# Altium PCB OK335xD V2.4 20160121.PcbDoc (part 2 of 4)
Units mm, origin at the board's own origin, x right, y up, seen from the top; angles counter-clockwise.
Board outline 190 x 130 mm, 4 copper layers (Top Layer, GND, POWER, Bottom Layer); 326 components, 332 nets, 1399 pads, 799 vias.
Unrouted connection lines stored in the file: 413.
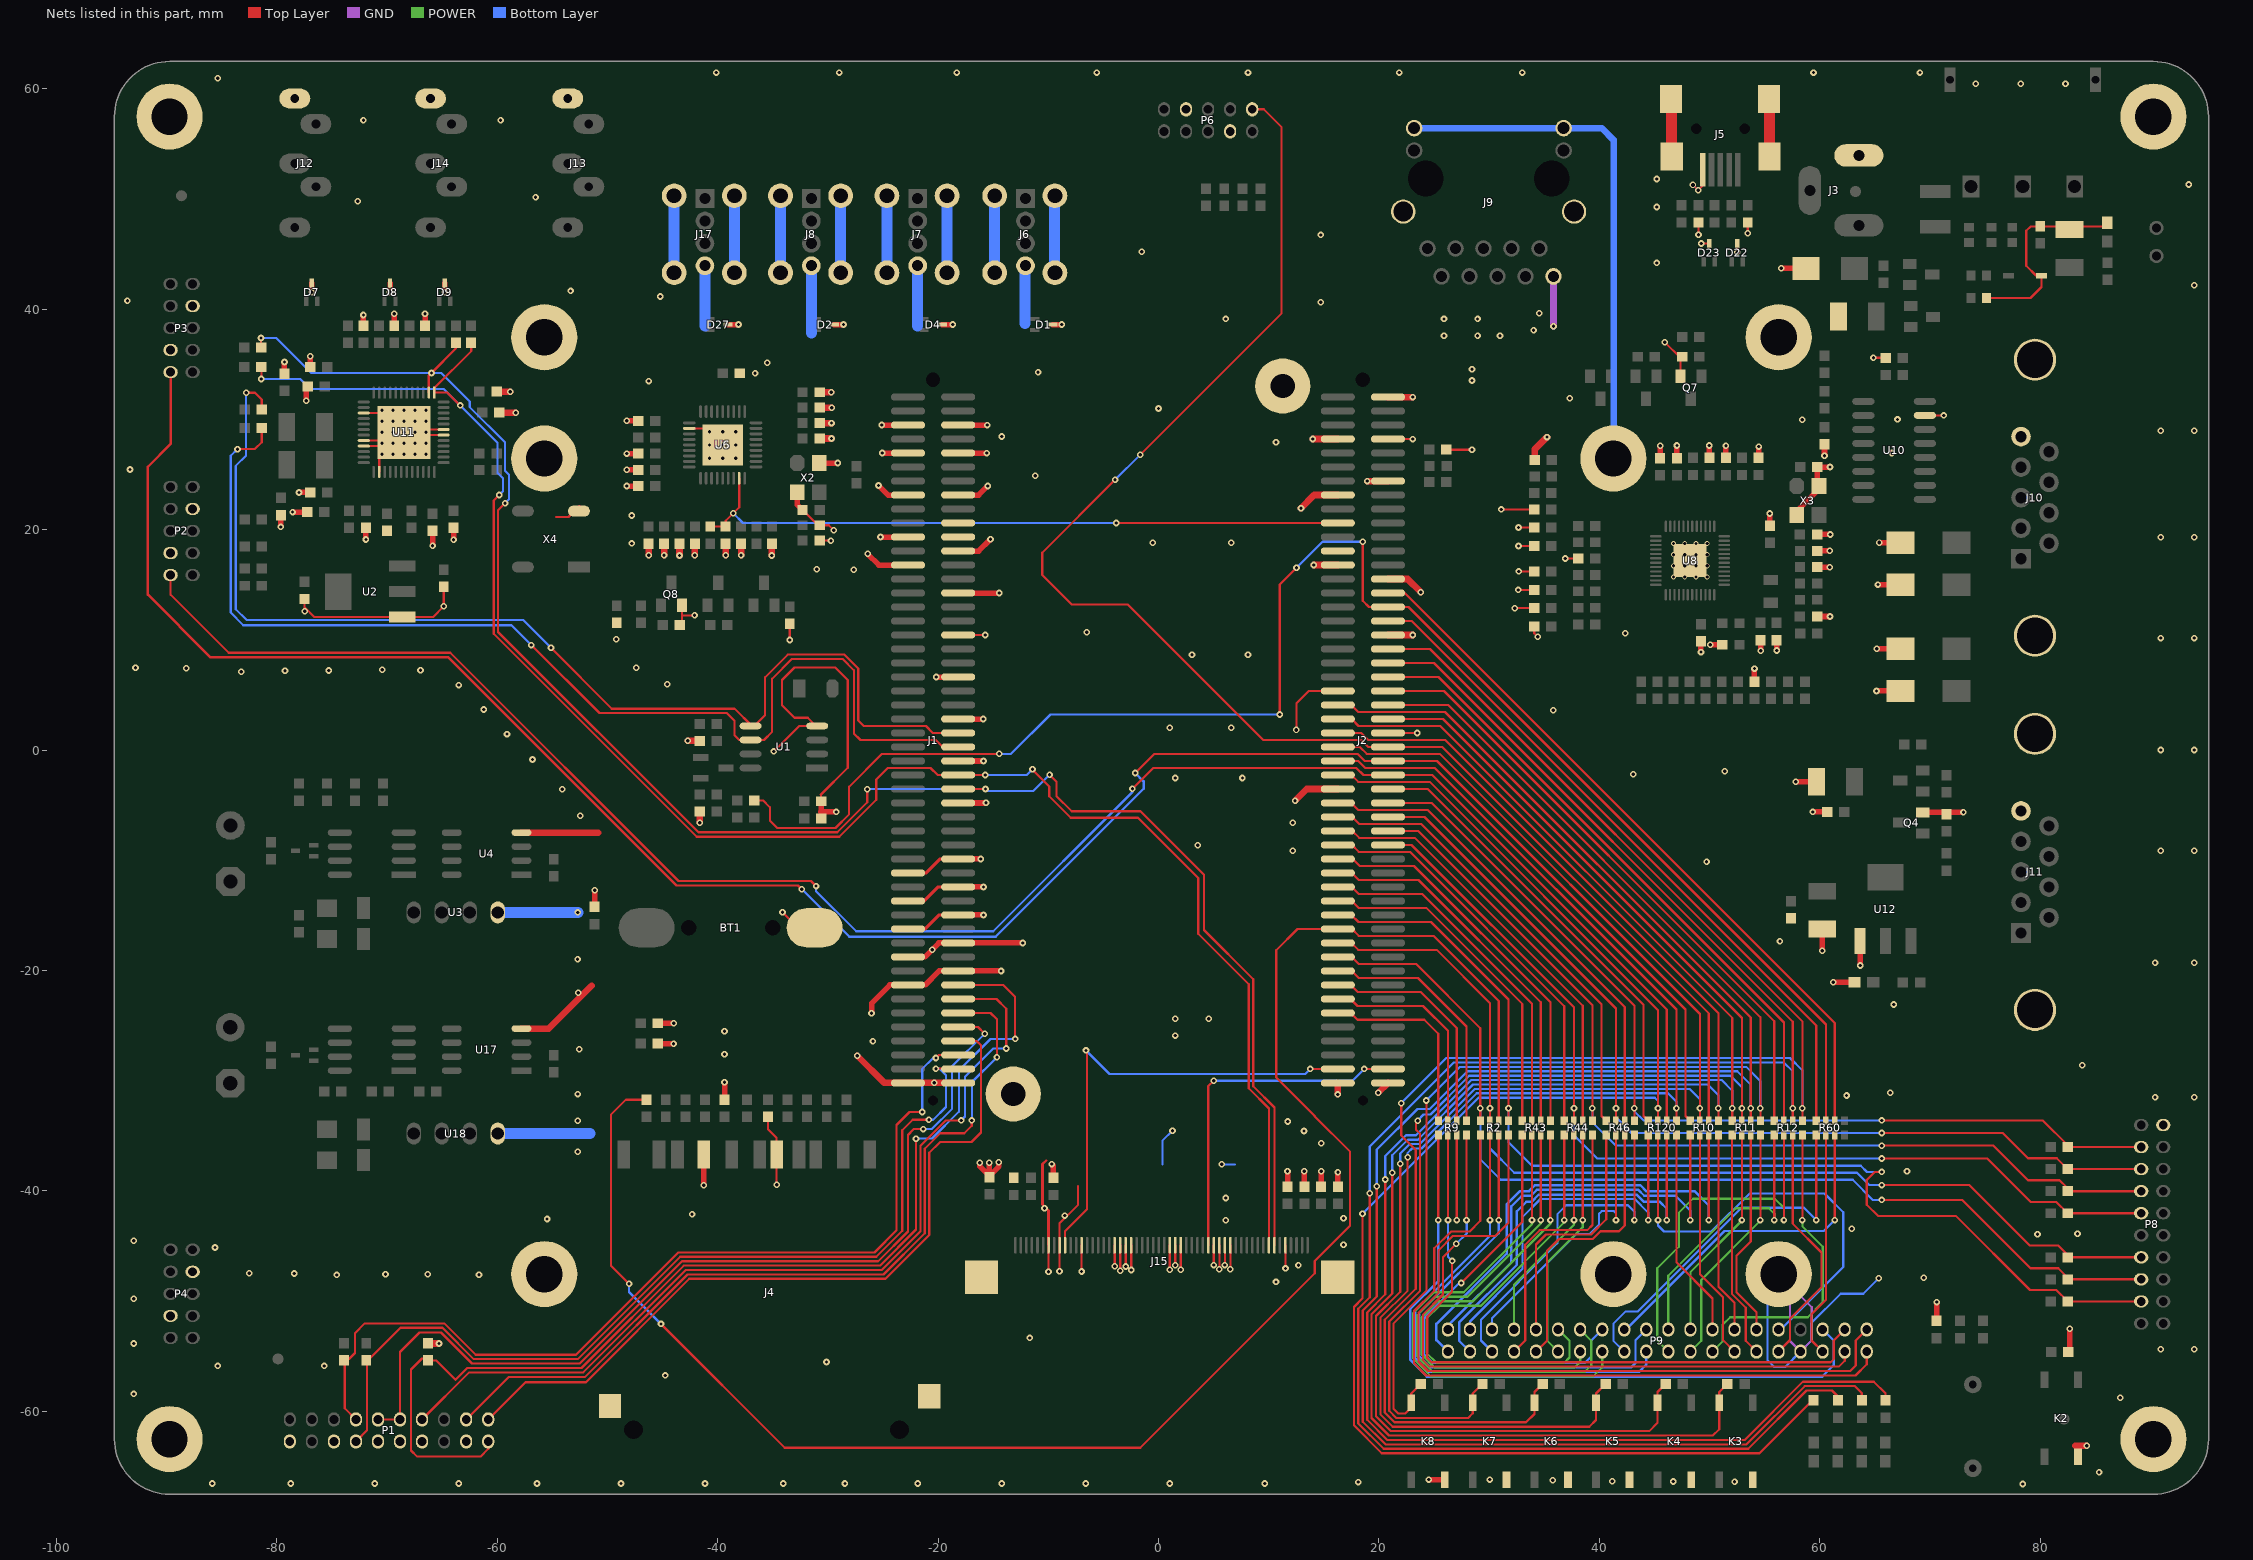
[diagram p4: the nets of this part, all layers, seen from the top]

## Via types
v1: diameter 0.6, hole 0.3, Top Layer to Bottom Layer, tented both sides, 718 vias
v2: diameter 0.66, hole 0.3, Top Layer to Bottom Layer, tented both sides, 34 vias
v3: diameter 0.6, hole 0.35, Top Layer to Bottom Layer, tented both sides, 25 vias
v4: diameter 0.45, hole 0.3, Top Layer to Bottom Layer, tented both sides, 16 vias
v5: diameter 0.4, hole 0.254, Top Layer to Bottom Layer, 4 vias
v6: diameter 0.6, hole 0.3, Top Layer to Bottom Layer, 2 vias

## Nets (pads, with @x,y where several pads share a name; then routed paths per layer and width w, separated by ;. In a path a pad name is that pad's centre, name@x,y a point inside that pad or via, vN(x,y) a via of type N, cw(c..) or ccw(c..) an arc to the next point about the centre after c; other vN are vias at no path point) (continued)
GND: BT1.2 C1.1 C2.1 C3.2 C4.1 C5.2 C6.2 C7.2 C9.2 C10.2 C11.2 C12.2 C14.2 C15.2 C16.2 C17.2 C18.1 C19.1 C20.1 C21.2 C22.2 C23.1 C24.2 C25.2 C26.2 C27.2 C28.2 C29.2 C30.2 C31.2 C32.2 C33.2 C34.1 C35.1 C36.1 C37.1 C38.1 C39.1 C40.1 C41.1 C42.1 C43.1 C44.1 C45.1 C46.1 C47.1 C50.2 C51.2 C56.2 C58.2 C60.2 C61.2 C62.2 C63.2 C64.2 C65.2 C66.2 C67.1 C68.2 C69.2 C70.2 C71.1 C72.2 C73.2 C74.2 C76.1 C77.1 C78.2 C79.1 C80.1 C83.2 C84.2 C85.2 D1.3 D2.3 D4.3 D5.1 D6.1 D7.3 D8.3 D9.3 D10.1 D11.1 D12.1 D13.1 D22.3 D23.3 D27.3 J1.5 J1.6 J1.9 J1.10 J1.15 J1.16 J1.21 J1.24 J1.25 J1.30 J1.36 J1.42 J1.48 J1.54 J1.60 J1.68 J1.69 J1.72 J1.73 J1.76 J1.77 J1.80 J1.81 J1.84 J1.85 J1.99 J1.100 J2.2 J2.7 J2.8 J2.14 J2.15 J2.25 J2.28 J2.36 J2.43 J2.50 J2.57 J2.99 J2.100 J3.2 J4.3@-34.644,-36.703 J4.6 J4.12 J4.13 J5.5 J5.6 J5.7 J5.8 J5.9 J6.0 J6.4 J7.0 J7.4 J8.0 J8.4 J9.1 J9.D2 J9.D4 J9.SHLD1 J9.SHLD2 J10.5 J10.10 J10.11 J11.5 J11.10 J11.11 J12.5 J13.5 J14.5 J15.5 J15.15 J15.16 J15.17 J15.18 J15.24 J15.25 J15.26 J15.33 J15.34 J15.35 J15.36 J15.42 J15.46 J15.48 J15.55 J15.56 J17.0 J17.4 K2.3 K3.3 K4.3 K5.3 K6.3 K7.3 K8.3 LED1.2 LED2.2 P1.4 P1.8 P1.10 P1.12 P1.16 P1.20 P2.4 P2.7 P3.4 P3.7 P4.4 P4.7 P6.4 P6.7 P8.2 P9.8 pad. pad.5 pad.6 pad.11 Q4.2 Q7.2 Q8.2 R29.2 R36.1 R42.1 R45.1 R53.1 R54.2 R55.2 R56.2 R57.2 R58.2 R85.2 R88.1 R89.1 R90.1 R91.1 R92.1 R93.1 R94.1 R95.1 R101.1 R102.1 R106.2 R111.2 R114.2 R117.2 R141.1 U1.4 U2.3 U3.1 U4.4 U6.11 U6.37 U8.49 U10.15 U11.0 U11.15 U11.20 U11.21 U11.26 U11.42 U11.43 U12.3 U17.4 U18.1 X2.2 X2.4 X3.2 X3.4 X4.2 | length 654.2
  Top Layer w0.2: v1(-77.47,12.598) -77.47,12.954 ; C11.2@-77.47,13.703 -77.47,12.954 ; U11.21@-72.103,27.579 U11.0@-70.453,27.579 ; U11.20@-72.103,28.079 U11.0@-69.453,28.079 ; U11.15@-72.103,30.579 -70.203,30.579 v2(-69.453,29.829) v2(-68.453,28.829) ; U11.26@-70.703,25.229 -70.703,26.579 v2(-70.453,26.829) v2(-69.453,27.829) v2(-68.453,28.829) ; U11.0@-66.453,29.079 U11.43@-64.853,29.079 ; U11.42@-64.853,28.579 -68.203,28.579 v2(-68.453,28.829) ; C73.2@-64.851,14.69 v1(-64.851,13.035) -65.808,12.078 U2.3@-68.628,12.078 -76.594,12.078 -77.47,12.954 ; -54.651,21.143 -53.533,21.143 X4.2@-52.553,22.123 ; R114.2@-43.243,11.531 -43.243,12.217 ; Q8.2@-43.243,13.132 -43.243,12.217 ; U6.11@-42.567,29.184 -41.042,29.184 v2(-40.742,28.884) v2(-39.542,27.684) ; v1(-42.088,12.217) -43.243,12.217 ; C12.2@-35.433,-33.274 -35.433,-34.417 -34.644,-35.206 J4.3@-34.644,-36.703 v1(-34.644,-39.445) ; v1(-34.9,-0.127) -32.588,2.184 -31.085,2.184 -31.822,2.921 -33.02,2.921 -34.163,4.064 -34.163,6.35 -33.02,7.493 -29.337,7.493 -28.194,6.35 -28.194,-1.613 -30.619,-4.039 ; v1(-34.112,-14.707) -32.69,-16.129 BT1.2@-31.191,-16.129 ; v1(-33.452,9.982) C16.2@-33.452,11.468 ; C20.1@-32.296,21.793 -30.899,20.396 C33.2@-30.746,20.396 -29.921,20.396 v1(-29.464,19.939) ; R53.1@-30.746,18.999 v1(-29.718,18.999) ; -30.632,-4.026 -30.619,-4.039 ; -30.619,-5.613 -30.619,-4.039 ; J1.36@-18.175,10.435 v1(-15.727,10.435) ; -10.516,-37.567 -10.185,-37.236 ; v1(-9.975,-47.327) J15.48@-9.975,-44.925 ; v1(-8.975,-47.304) J15.46@-8.975,-44.925 -8.975,-42.935 -7.29,-41.25 -7.29,-39.548 ; v1(-6.975,-47.31) J15.42@-6.975,-44.925 ; v1(-3.975,-46.85) J15.36@-3.975,-44.925 ; v1(-3.475,-47.249) J15.35@-3.475,-44.925 ; v1(-2.975,-46.86) J15.34@-2.975,-44.925 ; v1(-2.475,-47.182) J15.33@-2.475,-44.925 ; v1(1.025,-47.159) J15.26@1.025,-44.925 ; v1(1.525,-46.735) J15.25@1.525,-44.925 ; v1(2.025,-47.161) J15.24@2.025,-44.925 ; v1(5.025,-46.732) J15.18@5.025,-44.925 ; v1(5.525,-47.105) J15.17@5.525,-44.925 ; v1(6.025,-46.731) J15.16@6.025,-44.925 ; v1(6.525,-47.114) J15.15@6.525,-44.925 ; v1(11.525,-47.034) J15.5@11.525,-44.925 ; v3@12.522,1.803 12.522,4.242 13.639,5.358 J2.43@16.275,5.358 ; J2.50@20.821,1.549 J2.50@20.825,1.545 v1(23.474,1.545) ; J2.8@20.825,28.215 v1(23.068,28.215) ; R36.1@26.124,27.254 v1(28.448,27.254) ; v1(31.102,21.832) R95.1@34.103,21.832 ; v1(32.331,12.874) R88.1@34.103,12.874 ; v1(32.639,14.529) R90.1@34.099,14.529 ; v1(32.664,18.517) R89.1@34.099,18.517 ; v1(32.664,20.193) R93.1@34.099,20.193 ; v1(32.69,16.205) R92.1@34.099,16.205 ; R91.1@34.099,11.201 34.099,10.605 v1(34.417,10.287) ; v1(36.897,17.383) C46.1@38.102,17.383 ; v1(45.949,37.008) 47.358,35.598 Q7.2@47.358,33.909 ; v3(48.489,51.283) v1(48.971,50.8) 49.375,51.204 J5.5@49.375,52.655 ; v1(48.997,46.761) R45.1@48.997,47.866 ; v1(49.238,45.961) D23.3@49.962,45.961 ; v1(52.527,45.161) D22.3@52.527,45.961 ; v1(53.467,46.888) C15.2@53.467,47.866 ; v1(64.872,35.585) C50.2@65.976,35.585 ; U10.15@69.544,30.36 v1(71.254,30.36) ; R58.2@75.122,41.021 79.121,41.021 80.113,42.013 D6.1@80.113,43.053 79.629,43.053 78.74,43.942 78.74,47.117 79.134,47.511 C22.2@80.01,47.511 85.777,47.511 LED1.2@86.106,47.84
  Top Layer w0.26: -10.516,-37.567 -10.516,-41.224 -9.975,-41.765 J15.48@-9.975,-44.925
  Top Layer w0.3: J1.77@-22.725,-16.232 -21.159,-16.232 -19.893,-14.965 J1.76@-18.175,-14.965 ; J1.73@-22.725,-13.692 -21.235,-13.692 -19.969,-12.425 J1.72@-18.175,-12.425 ; J1.69@-22.725,-11.152 -21.058,-11.152 -19.791,-9.885 J1.68@-18.175,-9.885
  Top Layer w0.5: v1(-79.629,20.244) R101.1@-79.629,21.323 ; R102.1@-79.299,34.151 v1(-79.299,35.204) ; v1(-78.562,21.59) C63.2@-77.354,21.59 ; v1(-77.978,23.368) C64.2@-76.975,23.368 ; v1(-77.329,31.688) C61.2@-77.329,32.995 ; C62.2@-76.95,34.773 v1(-76.95,35.725) ; v1(-76.835,41.529) D7.3@-76.835,42.354 ; C56.2@-72.136,38.494 v1(-72.136,39.472) ; v1(-71.907,19.101) C66.2@-71.907,20.155 ; v1(-69.723,41.529) D8.3@-69.723,42.354 ; C60.2@-69.342,38.494 v1(-69.342,39.599) ; C58.2@-66.548,38.494 v1(-66.548,39.573) ; v1(-65.862,18.542) C69.2@-65.862,19.776 ; v1(-64.77,41.529) D9.3@-64.77,42.354 ; v1(-63.957,19.075) C70.2@-63.957,20.155 ; C2.1@-51.156,-14.236 v1(-51.156,-12.725) ; v1(-48.235,23.952) C26.2@-47.206,23.952 ; v1(-48.235,25.425) C24.2@-47.206,25.425 ; v1(-48.235,26.899) C29.2@-47.206,26.899 ; v1(-48.235,29.87) C30.2@-47.206,29.87 ; C67.1@-45.428,-26.645 v1(-43.993,-26.645) ; C1.1@-45.428,-24.79 v1(-43.967,-24.79) ; v1(-41.248,-39.495) J4.6@-41.248,-36.703 ; C14.2@-39.37,-31.724 v1(-39.37,-30.15) ; D27.3@-39.053,38.608 v1(-38.1,38.608) ; X2.2@-32.775,23.389 -32.775,22.272 C20.1@-32.296,21.793 ; X2.4@-30.775,26.039 v1(-29.104,26.039) ; -30.619,-5.613 -30.594,-5.613 ; C76.1@-30.594,-6.223 -30.594,-5.613 ; C77.1@-30.594,-4.648 -30.594,-5.613 ; D2.3@-29.401,38.608 v1(-28.575,38.608) ; v1(-29.235,-5.613) -30.594,-5.613 ; v1(-26.391,17.805) -25.374,16.788 J1.25@-22.725,16.788 ; v1(-26.035,-23.876) -26.035,-22.987 -24.36,-21.312 -22.725,-21.312 -21.159,-21.312 -19.893,-20.045 J1.84@-18.175,-20.045 v1(-14.279,-20.045) ; v1(-25.4,24.003) -24.535,23.138 J1.15@-22.725,23.138 ; v1(-25.223,19.328) J1.21@-22.725,19.328 ; v1(-25.12,29.488) J1.5@-22.725,29.488 ; v1(-25.069,26.948) J1.9@-22.725,26.948 ; J1.81@-22.725,-18.772 -21.185,-18.772 -19.918,-17.505 J1.80@-18.175,-17.505 v1(-12.315,-17.505) ; v1(-20.172,6.625) J1.42@-18.175,6.625 ; D4.3@-19.622,38.608 v1(-18.669,38.608) ; J1.76@-18.175,-14.965 v1(-15.879,-14.965) ; J1.72@-18.175,-12.425 v1(-15.879,-12.425) ; J1.68@-18.175,-9.885 v1(-16.133,-9.885) ; J1.60@-18.175,-4.805 -15.676,-4.805 v1(-15.646,-4.775) ; J1.54@-18.175,-0.995 v1(-15.879,-0.995) ; J1.48@-18.175,2.815 v1(-15.905,2.815) ; J1.30@-18.175,14.245 v1(-14.457,14.245) ; J1.24@-18.175,18.055 -16.311,18.055 v1(-15.24,19.126) ; J1.16@-18.175,23.135 -16.311,23.135 v1(-15.494,23.952) ; J1.10@-18.175,26.945 v1(-15.575,26.945) ; J1.6@-18.175,29.485 v1(-15.524,29.485) ; v1(-16.205,-37.44) -16.205,-37.784 C74.2@-15.342,-38.648 ; v1(-15.342,-37.44) C74.2@-15.342,-38.648 ; v1(-14.478,-37.414) -14.478,-37.784 C74.2@-15.342,-38.648 ; v1(-9.677,-37.567) -9.525,-37.719 C4.1@-9.525,-38.824 ; D1.3@-9.589,38.608 v1(-8.763,38.608) ; C85.2@11.709,-39.611 v1(11.709,-38.227) ; C84.2@13.233,-39.611 v1(13.233,-38.227) ; C83.2@14.757,-39.611 v1(14.757,-38.227) ; C78.2@16.281,-39.611 v1(16.281,-38.303) ; v1(24.511,-66.192) K8.3@25.984,-66.192 ; C41.1@45.516,26.493 v1(45.516,27.609) ; C45.1@47.041,26.493 v1(47.041,27.635) ; v1(49.225,8.89) C39.1@49.225,9.868 ; C40.1@49.986,26.499 v1(49.986,27.634) ; v1(50.063,9.55) C36.1@51.043,9.55 ; C47.1@51.486,26.499 v1(51.486,27.61) ; C79.1@54.077,6.211 v1(54.077,7.391) ; R85.2@54.458,26.505 v1(54.458,27.534) ; v1(54.641,8.997) C35.1@54.641,9.981 ; C42.1@55.474,20.358 v1(55.474,21.463) ; v1(56.091,9.035) C34.1@56.091,9.981 ; v1(56.515,43.713) D5.1@59.141,43.713 ; v1(57.836,-2.87) C6.2@59.712,-2.87 ; X3.2@57.916,21.306 57.916,21.696 59.779,23.559 C37.1@59.779,25.679 v1(60.935,25.679) ; v1(59.36,-5.613) C7.2@60.668,-5.613 ; C71.1@59.754,12.116 v1(60.935,12.116) ; C38.1@59.754,19.558 v1(60.96,19.558) ; C43.1@59.76,16.597 v1(60.92,16.597) ; C44.1@59.76,18.078 v1(60.916,18.078) ; v1(60.223,-18.212) C9.2@60.223,-16.234 ; v1(60.431,26.691) C51.2@60.431,27.751 ; v1(61.214,-21.082) LED2.2@63.158,-21.082 ; v1(63.665,-19.546) U12.3@63.665,-17.326 ; v1(65.151,5.359) D12.1@67.31,5.359 ; v1(65.176,9.195) D13.1@67.31,9.195 ; v1(65.278,15.011) D10.1@67.31,15.011 ; v3(65.405,18.821) D11.1@67.31,18.821 ; Q4.2@69.342,-5.651 v1(73.038,-5.651) ; R117.2@70.612,-51.803 v1(70.612,-50.089) ; C80.1@82.688,-54.61 v1(82.688,-52.513)
  Top Layer w0.6: R29.2@-66.434,-53.848 v1(-65.278,-53.848) ; C68.2@-60.058,32.512 v1(-58.826,32.512) ; C5.2@-59.679,30.607 v1(-58.318,30.607) ; U17.4@-57.798,-25.273 -55.321,-25.273 -51.435,-21.387 ; U4.4@-57.798,-7.493 -50.851,-7.493 ; v1(-46.253,17.678) R54.2@-46.253,18.732 ; v1(-44.856,17.678) C25.2@-44.856,18.732 ; v1(-43.459,17.653) R55.2@-43.459,18.732 ; v1(-42.697,0.838) C3.2@-41.618,0.838 ; v1(-42.062,17.678) R56.2@-42.062,18.732 ; v1(-41.618,-6.602) C72.2@-41.618,-5.563 ; v1(-39.268,17.678) C18.1@-39.268,18.732 ; v1(-37.871,17.678) C17.2@-37.871,18.732 ; v1(-35.077,17.653) R42.1@-35.077,18.732 ; C19.1@-30.746,28.27 v1(-29.667,28.27) ; C27.2@-30.746,29.667 v1(-29.667,29.667) ; R57.2@-30.746,31.064 v1(-29.642,31.064) ; C32.2@-30.746,32.461 v1(-29.693,32.461) ; v1(-27.33,-27.737) -24.866,-30.202 -22.725,-30.202 v1(-20.345,-30.202) J1.100@-18.178,-30.202 ; v1(12.395,-4.597) 13.461,-3.532 J2.57@16.275,-3.532 ; v1(12.929,21.946) 14.121,23.138 J2.15@16.275,23.138 ; v1(13.996,28.218) J2.7@16.275,28.218 ; v1(14.096,16.788) J2.25@16.275,16.788 ; v1(16.275,-31.248) J2.99@16.275,-30.202 ; v1(18.944,24.405) J2.14@20.825,24.405 ; v3(19.94,-31.09) J2.100@20.825,-30.205 ; J2.36@20.825,10.435 v1@23.063,10.435 ; J2.28@20.825,15.515 22.61,15.515 v1(23.8,14.326) ; J2.2@20.825,32.025 v1(23.068,32.025) ; R94.1@34.125,26.314 34.125,27.267 v1(35.255,28.397) ; 83.185,-63.119 v1(84.226,-63.119)
  Top Layer w1: J5.7@46.555,53.875 46.555,57.731 ; J5.6@55.445,53.875 J5.8@55.445,59.03
  GND w0.2: pad.@56.275,-47.55 pad.@57.302,-48.577 ; pad.@57.302,-48.577 57.302,-53.618 P9.8@58.262,-54.578 59.284,-53.557 59.284,-50.559 pad.@57.302,-48.577
  GND w0.5: v1@13.183,-38.227 v1(13.233,-38.227)
  GND w0.6: v1(35.84,38.456) J9.1@35.84,42.977
  POWER w0.2: v1@5.715,-37.617 v1(5.74,-37.592)
  Bottom Layer w0.2: 0.354,-37.592 0.354,-35.46 v1(1.27,-34.544) ; v1(5.74,-37.592) 6.958,-37.592 ; pad.@56.275,-47.55 55.27,-48.555 55.27,-55.372 55.88,-55.982 56.859,-55.982 P9.8@58.262,-54.578 59.233,-53.607 59.233,-51.994 61.9,-49.327 63.957,-49.327 v1(65.354,-47.93)
  Bottom Layer w0.5: v1(-14.457,14.245) v1@-14.453,14.249
  Bottom Layer w0.6: J9.D4@23.2,56.427 J9.D2@36.76,56.427 40.22,56.427 41.3,55.347 pad.11@41.3,26.848
  Bottom Layer w1: U18.1@-59.944,-34.798 -51.562,-34.798 ; U3.1@-59.944,-14.732 v1(-52.68,-14.732) ; J17.0@-43.942,43.307 J17.0@-43.942,50.292 ; -41.148,38.481 J17.4@-41.148,43.942 ; J17.0@-38.481,43.307 J17.0@-38.481,50.292 ; J8.0@-34.29,43.307 J8.0@-34.29,50.292 ; -31.496,37.846 J8.4@-31.496,43.942 ; J8.0@-28.829,43.307 J8.0@-28.829,50.292 ; J7.0@-24.638,43.561 J7.0@-24.638,50.546 ; -21.844,38.481 J7.4@-21.844,44.196 ; J7.0@-19.177,43.561 J7.0@-19.177,50.546 ; J6.0@-14.89,43.59 J6.0@-14.89,50.575 ; -12.096,38.704 J6.4@-12.096,44.225 ; J6.0@-9.429,43.59 J6.0@-9.429,50.575
  other v1: 78.41,-66.599 -85.852,-66.548 -78.74,-66.548 -71.12,-66.548 -63.5,-66.548 -56.388,-66.548 -48.768,-66.548 -41.148,-66.548 -34.036,-66.548 -28.448,-66.548 -21.844,-66.548 -14.224,-66.548 -6.604,-66.548 1.016,-66.548 9.652,-66.548 18.136,-66.421 52.273,-66.396 46.711,-66.37 41.173,-66.345 35.763,-66.243 30.048,-66.192 85.344,-65.532 87.274,-58.776 -92.964,-58.42 -44.755,-56.744 -85.344,-55.88 -75.692,-55.88 -30.124,-55.524 90.932,-54.356 93.98,-54.356 -92.964,-53.848 -11.684,-53.34 -92.964,-49.784 10.668,-48.26 69.444,-47.879 -74.549,-47.625 -61.646,-47.6 -70.129,-47.574 -66.294,-47.574 -78.41,-47.498 -82.499,-47.473 12.7,-46.736 -85.598,-45.136 16.789,-44.882 -92.964,-44.526 79.756,-43.942 83.388,-43.891 62.89,-43.434 6.096,-42.672 -55.474,-42.545 16.789,-42.469 -8.509,-42.24 -42.316,-42.113 -10.338,-41.58 6.096,-40.64 67.92,-38.227 -52.68,-36.449 14.783,-35.687 13.208,-34.569 11.735,-33.706 -52.68,-33.63 90.424,-31.496 93.98,-31.496 62.433,-31.344 -52.68,-31.217 66.396,-31.09 83.82,-28.6 -52.553,-27.153 -25.908,-26.416 1.524,-25.908 1.524,-24.384 4.572,-24.384 66.726,-23.089 -52.654,-22.022 90.424,-19.304 93.98,-19.304 -52.705,-18.974 -20.523,-18.11 56.388,-17.348 49.733,-10.135 12.192,-9.144 90.932,-9.144 93.98,-9.144 3.556,-8.636 12.192,-6.604 -52.451,-5.969 -54.102,-3.556 1.524,-2.54 7.62,-2.54 43.078,-2.184 51.384,-1.93 -56.794,-0.864 90.932,0 93.98,0 -59.106,1.448 1.016,2.032 6.604,2.032 35.814,3.607 -61.214,3.683 -63.475,5.893 -44.577,5.969 -83.21,7.112 -79.248,7.188 -75.286,7.214 -66.954,7.239 -70.434,7.29 -88.214,7.417 -92.812,7.468 -47.371,7.468 3.048,8.636 8.128,8.636 -49.2,10.058 90.932,10.16 93.98,10.16 23.063,10.439 42.342,10.592 -6.502,10.693 -27.635,16.358 -31.013,16.408 -47.777,18.745 -0.508,18.796 6.604,18.796 90.932,19.304 93.98,19.304 -47.777,21.285 -11.176,24.892 -93.32,25.451 66.548,26.949 10.668,27.94 -14.224,28.448 90.932,28.956 93.98,28.956 58.42,29.972 67.056,29.997 0,30.988 37.313,31.928 -46.253,33.477 28.448,33.528 -36.601,34.188 -10.922,34.29 28.448,34.544 -35.484,35.128 25.908,37.592 28.956,37.592 30.988,37.592 34.036,38.1 6.096,39.116 25.908,39.116 28.956,39.116 34.544,39.624 14.732,40.64 -93.548,40.767 -45.212,41.148 -53.34,41.656 93.98,42.164 45.212,44.196 -1.524,45.212 14.732,46.736 45.212,49.276 -72.644,49.784 -56.515,50.165 93.472,51.308 45.212,51.816 -72.136,57.15 -59.69,57.15 74.168,60.452 78.232,60.452 82.296,60.452 -85.344,60.96 -40.132,61.468 -28.956,61.468 -18.288,61.468 -5.588,61.468 8.128,61.468 21.844,61.468 33.02,61.468 59.436,61.468 69.088,61.468
  other v2: -40.742,26.484 -39.542,26.484 -38.342,26.484 -69.453,26.829 -68.453,26.829 -67.453,26.829 -66.453,26.829 -40.742,27.684 -38.342,27.684 -70.453,27.829 -68.453,27.829 -67.453,27.829 -66.453,27.829 -70.453,28.829 -69.453,28.829 -67.453,28.829 -66.453,28.829 -39.542,28.884 -38.342,28.884 -70.453,29.829 -68.453,29.829 -67.453,29.829 -66.453,29.829 -70.453,30.829 -69.453,30.829 -68.453,30.829 -67.453,30.829 -66.453,30.829
  other v3: 12.497,1.829
  other v4: 46.736,15.697 47.752,15.697 48.768,15.697 49.784,15.697 46.736,16.713 47.752,16.713 48.768,16.713 49.784,16.713 46.736,17.729 47.752,17.729 48.768,17.729 49.784,17.729 46.736,18.745 47.752,18.745 48.768,18.745 49.784,18.745
  other v6: -39.37,-27.61 -39.37,-25.527
GPIO1_16: J2.55 R120.3 R135.2 | length 144.1
  Top Layer w0.2: J2.55@16.275,-2.262 17.502,-2.262 18.13,-2.89 24.607,-2.89 45.32,-23.603 v1(45.32,-32.512) R120.3@45.32,-33.64 ; v1(18.517,-42.062) 18.517,-49.747 17.736,-50.528 17.736,-61.272 20.263,-63.799 54.54,-63.799 59.326,-59.012 R135.2@59.43,-59.012
  Bottom Layer w0.2: v1(18.517,-42.062) 29.032,-31.547 45.034,-31.547 45.32,-31.833 v1(45.32,-32.512)
GPIO1_17: J2.40 R12.2 R136.2 | length 177.3
  Top Layer w0.2: v1(19.177,-40.208) 19.177,-49.653 18.136,-50.694 18.136,-61.106 20.429,-63.399 53.518,-63.399 58.801,-58.115 61.112,-58.115 61.648,-58.651 R136.2@61.648,-59.012 ; J2.40@20.825,7.895 24.998,7.895 57.55,-24.657 v1(57.55,-32.512) R12.2@57.55,-33.64
  Bottom Layer w0.2: v1@19.177,-40.259 v1(19.177,-40.208) 19.177,-35.966 26.797,-28.347 56.744,-28.347 57.55,-29.153 v1(57.55,-32.512)
GPIO1_18: J2.45 R11.2 R137.2 | length 172.6
  Top Layer w0.2: J2.45@16.275,4.088 17.502,4.088 18.13,3.46 26.004,3.46 53.74,-24.276 v1(53.74,-32.512) R11.2@53.74,-33.64 ; v1(19.812,-39.573) 19.812,-49.583 18.536,-50.859 18.536,-60.94 20.594,-62.999 53.352,-62.999 58.635,-57.715 63.202,-57.715 63.816,-58.329 R137.2@63.816,-59.012
  Bottom Layer w0.2: v1@19.812,-39.624 v1(19.812,-39.573) 19.812,-36.246 23.495,-32.563 24.622,-32.563 28.038,-29.147 52.515,-29.147 53.74,-30.372 v1(53.74,-32.512)
GPIO1_19: J2.47 R11.4 R138.2 | length 168.4
  Top Layer w0.2: J2.47@16.275,2.818 17.527,2.818 18.155,2.19 25.572,2.19 52.065,-24.303 v1(52.065,-32.512) R11.4@52.065,-33.64 ; v1(20.574,-38.964) 20.574,-49.387 18.936,-51.025 18.936,-60.775 20.76,-62.599 53.186,-62.599 58.47,-57.315 64.91,-57.315 65.958,-58.363 R138.2@65.958,-59.012
  Bottom Layer w0.2: v1@20.574,-38.989 v1(20.574,-38.964) 20.574,-36.842 22.465,-34.95 23.366,-34.95 28.369,-29.947 51.105,-29.947 52.065,-30.907 v1(52.065,-32.512)
GPIO1_20: J2.49 K3.2 R10.1 R17.2 | length 150.1
  Top Layer w0.2: J2.49@16.275,1.548 18.391,1.548 19.025,0.914 26.01,0.914 50.805,-23.881 v1(50.805,-32.512) R10.1@50.805,-33.64 ; v1(21.209,-38.354) 21.209,-49.318 19.336,-51.191 19.336,-60.609 20.926,-62.199 50.298,-62.199 50.876,-61.621 K3.2@50.876,-59.207 50.876,-58.255 R17.2@51.625,-57.506
  Bottom Layer w0.2: v1(21.209,-38.354) 21.209,-36.772 22.631,-35.35 23.532,-35.35 28.535,-30.347 49.829,-30.347 50.805,-31.323 v1(50.805,-32.512)
GPIO1_21: J2.51 K4.2 R10.3 R31.2 | length 138.5
  Top Layer w0.2: J2.51@16.275,0.278 18.264,0.278 18.892,-0.35 25.521,-0.35 49.13,-23.959 v1(49.13,-32.512) R10.3@49.13,-33.64 ; v1(21.946,-37.541) 21.946,-49.147 19.736,-51.356 19.736,-60.443 21.091,-61.799 44.532,-61.799 45.288,-61.043 K4.2@45.288,-59.207 45.288,-58.255 R31.2@46.037,-57.506
  Bottom Layer w0.2: v1@21.946,-37.567 v1(21.946,-37.541) 21.946,-36.601 22.797,-35.75 23.697,-35.75 28.701,-30.747 48.197,-30.747 49.13,-31.68 v1(49.13,-32.512)
GPIO1_22: J2.53 K5.2 R32.2 R120.1 | length 126.4
  Top Layer w0.2: J2.53@16.275,-0.992 18.137,-0.992 18.771,-1.626 25.07,-1.626 46.995,-23.551 v1(46.995,-32.512) R120.1@46.995,-33.64 ; v1(22.606,-36.957) 22.606,-49.052 20.136,-51.522 20.136,-60.278 21.257,-61.399 39.097,-61.399 39.7,-60.795 K5.2@39.7,-59.207 39.7,-58.382 R32.2@40.576,-57.506
  Bottom Layer w0.2: v1(22.606,-36.957) 22.606,-36.551 23.006,-36.15 23.863,-36.15 28.867,-31.147 46.234,-31.147 46.995,-31.907 v1(46.995,-32.512)
GPIO1_23: J2.38 K6.2 R12.1 R124.2 | length 149.7
  Top Layer w0.2: J2.38@20.825,9.165 24.642,9.165 58.425,-24.618 v1(58.425,-32.512) R12.1@58.425,-33.64 ; v1(22.022,-32.055) 22.022,-34.976 23.343,-36.297 23.343,-48.881 20.536,-51.688 20.536,-60.112 21.423,-60.999 33.356,-60.999 34.112,-60.243 K6.2@34.112,-59.207 34.112,-58.255 R124.2@34.861,-57.506
  Bottom Layer w0.2: v1@22.022,-32.029 26.104,-27.947 57.309,-27.947 58.425,-29.063 v1(58.425,-32.512)
GPIO1_24: J2.48 K7.2 R11.3 R125.2 | length 124.9
  Top Layer w0.2: J2.48@20.825,2.815 25.811,2.815 52.94,-24.314 v1(52.94,-32.512) R11.3@52.94,-33.64 ; v1(23.52,-33.63) 23.368,-33.782 23.368,-34.442 23.743,-34.817 23.743,-49.047 20.936,-51.854 20.936,-59.946 21.588,-60.599 28.099,-60.599 28.524,-60.173 K7.2@28.524,-59.207 28.524,-58.382 R125.2@29.4,-57.506
  Bottom Layer w0.2: v1@23.52,-33.604 24.054,-33.071 24.68,-33.071 28.204,-29.547 51.899,-29.547 52.94,-30.588 v1(52.94,-32.512)
GPIO1_25: J2.46 K8.2 R11.1 R126.2 | length 123.3
  Top Layer w0.2: J2.46@20.825,4.085 26.293,4.085 54.615,-24.237 R11.1@54.615,-33.64 ; R126.2@23.812,-57.506 22.936,-58.382 K8.2@22.936,-59.207 22.936,-59.665 22.402,-60.199 21.754,-60.199 21.336,-59.78 21.336,-52.019 24.308,-49.047 v1(24.308,-31.801)
  Bottom Layer w0.2: v1@24.282,-31.826 v1(24.308,-31.801) 27.362,-28.747 53.334,-28.747 54.61,-30.023 v1(54.61,-32.512)
GPIO2_1: J2.75 P8.17 R2.1 R127.2 | length 100.2
  Top Layer w0.2: J2.75@16.275,-14.962 17.502,-14.962 18.15,-15.61 24.733,-15.61 31.755,-22.632 v1(31.755,-32.512) R2.1@31.755,-33.64 ; v1(65.634,-38.278) 64.999,-38.278 64.262,-39.014 64.262,-41.25 65.278,-42.266 72.339,-42.266 79.07,-48.997 81.461,-48.997 R127.2@82.489,-50.025 P8.17@89.164,-50.025
  Bottom Layer w0.2: v1(31.755,-32.512) 31.755,-35.59 33.884,-37.719 63.729,-37.719 64.287,-38.278 v1(65.634,-38.278)
GPIO3_1: C18.2 J2.19 R52.1 U6.26 | length 61.5
  Top Layer w0.2: R52.1@-40.665,20.282 C18.2@-39.268,20.282 -39.268,20.803 v1(-38.583,21.488) -38.042,22.029 U6.26@-38.042,24.659 ; v1(-3.834,20.598) J2.19@16.275,20.598
  Bottom Layer w0.2: v1(-38.583,21.488) -37.693,20.598 v1(-3.834,20.598)
GPIO3_2: J2.23
GPMC_A0-O: P9.9 R120.6 | length 40.6
  Top Layer w0.2: v1(45.32,-42.647) R120.6@45.32,-34.94
  Bottom Layer w0.2: v1(45.32,-42.647) 45.32,-43.136 45.872,-43.688 50.184,-43.688 53.638,-40.234 60.427,-40.234 62.128,-41.935 62.128,-46.914 56.464,-52.578 P9.9@56.262,-52.578
GPMC_A1-O: P9.10 R12.7 | length 22.3
  Top Layer w0.2: P9.10@56.262,-54.578 57.302,-53.538 57.302,-51.587 60.16,-48.73 60.16,-45.58 57.55,-42.97 R12.7@57.55,-34.94
GPMC_A2-O: P9.11 R11.7 | length 18.9
  Top Layer w0.2: R11.7@53.74,-34.94 53.74,-44.583 52.451,-45.872 52.451,-49.2 54.262,-51.011 P9.11@54.262,-52.578
GPMC_A3-O: P9.12 R11.5 | length 20.6
  Top Layer w0.2: R11.5@52.065,-34.94 52.051,-34.954 52.051,-49.365 53.289,-50.604 53.289,-53.605 P9.12@54.262,-54.578
GPMC_A4-O: P9.13 R10.8 | length 18.2
  Top Layer w0.2: R10.8@50.805,-34.94 50.805,-48.685 52.262,-50.142 P9.13@52.262,-52.578
GPMC_A5-O: P9.14 R10.6 | length 20.9
  Top Layer w0.2: R10.6@49.13,-34.94 49.13,-47.576 51.232,-49.678 51.232,-53.548 P9.14@52.262,-54.578
GPMC_A6-O: P9.15 R120.8 | length 19
  Top Layer w0.2: R120.8@46.995,-34.94 46.995,-46.487 50.262,-49.754 P9.15@50.262,-52.578
GPMC_A7-O: P9.16 R12.8 | length 28.7
  Top Layer w0.2: v1(58.425,-42.647) R12.8@58.425,-34.94
  POWER w0.2: P9.16@50.262,-54.578 51.206,-53.634 51.206,-52.121 51.867,-51.46 58.903,-51.46 60.274,-50.089 60.274,-45.06 58.425,-43.21 v1(58.425,-42.647)
GPMC_A8-O: P9.17 R11.6 | length 19.6
  Top Layer w0.2: v1(52.94,-42.647) R11.6@52.94,-34.94
  POWER w0.2: P9.17@48.262,-52.578 48.262,-47.369 52.94,-42.691 v1(52.94,-42.647)
GPMC_A9-O: P9.18 R11.8 | length 22.3
  Top Layer w0.2: v1(54.615,-42.647) R11.8@54.615,-34.94
  POWER w0.2: P9.18@48.262,-54.578 49.251,-53.59 49.251,-48.082 54.615,-42.718 v1(54.615,-42.647)
GPMC_A10: J2.44 R12.4 | length 56.5
  Top Layer w0.2: J2.44@20.825,5.355 25.912,5.355 55.875,-24.608 R12.4@55.875,-33.64
GPMC_A10-O: P9.19 R12.5 | length 25.5
  Top Layer w0.2: v1(55.875,-42.647) R12.5@55.875,-34.94
  POWER w0.2: P9.19@46.262,-52.578 46.262,-47.692 52.375,-41.58 55.372,-41.58 55.875,-42.083 v1(55.875,-42.647)
GPMC_A11: J2.42 R12.3 | length 57.8
  Top Layer w0.2: J2.42@20.825,6.625 25.404,6.625 56.75,-24.721 R12.3@56.75,-33.64
GPMC_A11-O: P9.20 R12.6 | length 33
  Top Layer w0.2: v1(56.75,-42.647) R12.6@56.75,-34.94
  POWER w0.2: P9.20@46.262,-54.578 45.263,-53.579 45.263,-47.015 47.219,-45.06 47.219,-41.986 48.489,-40.716 55.931,-40.716 56.75,-41.535 v1(56.75,-42.647)
GPMC_ADVN_ALE: J2.85 R9.2 | length 20.8
  Top Layer w0.2: J2.85@16.275,-21.312 17.451,-21.312 18.085,-21.946 23.8,-21.946 27.07,-25.216 R9.2@27.07,-33.64
GPMC_ADVN_ALE-O: R9.7 | length 7.7
  Top Layer w0.2: v1(27.07,-42.647) R9.7@27.07,-34.94
GPMC_BEN0_CLE: J2.83 R9.1 | length 22.3
  Top Layer w0.2: J2.83@16.275,-20.042 17.527,-20.042 18.161,-20.676 23.546,-20.676 27.945,-25.075 R9.1@27.945,-33.64
GPMC_BEN0_CLE-O: P9.4 R9.8 | length 61.6
  Top Layer w0.2: v1(27.026,-44.806) 25.819,-46.012 25.819,-49.397 23.99,-51.226 23.99,-55.32 24.614,-55.944 61.722,-55.944 62.262,-55.404 P9.4@62.262,-54.578 ; v1(27.945,-42.647) R9.8@27.945,-34.94
  Bottom Layer w0.2: v1(27.026,-44.806) 27.965,-43.866 27.965,-42.667 v1(27.945,-42.647)
GPMC_BEN1: J2.32 R6.2 R60.3 | length 148.1
  Top Layer w0.2: R6.2@-36.665,-4.572 -35.865,-4.572 -35.255,-5.182 -35.255,-6.401 -34.588,-7.068 -29.299,-7.068 -28.067,-5.835 -28.067,-3.327 -25.09,-0.35 v1(-14.458,-0.35) ; v1(10.998,3.226) 10.998,15.011 v1(12.522,16.535) ; v1(18.542,18.898) 18.542,13.538 19.105,12.975 J2.32@20.825,12.975 22.687,12.975 60.56,-24.898 R60.3@60.56,-33.64
  Bottom Layer w0.2: v1(-14.458,-0.35) -13.38,-0.35 -9.804,3.226 v1(10.998,3.226) ; v1(12.522,16.535) 14.884,18.898 v1(18.542,18.898)
GPMC_BEN1-O: P9.6 R60.6 | length 20.6
  Top Layer w0.2: P9.6@60.262,-54.578 59.258,-53.574 59.258,-51.181 60.56,-49.879 R60.6@60.56,-34.94
GPMC_CLK-O: P9.1 R2.8 | length 70.1
  Top Layer w0.2: R2.8@31.755,-34.94 31.755,-42.896 30.556,-44.094 26.702,-44.094 25.419,-45.378 25.419,-49.232 23.59,-51.06 23.59,-55.486 24.448,-56.344 62.763,-56.344 63.271,-55.836 63.271,-53.569 P9.1@64.262,-52.578
GPMC_CSN1: J2.81 P8.15 R2.4 R133.2 | length 93.2
  Top Layer w0.2: J2.81@16.275,-18.772 17.527,-18.772 18.155,-19.4 23.362,-19.4 29.205,-25.243 R2.4@29.205,-33.64 ; v1(65.634,-40.818) 72.923,-40.818 79.121,-47.015 81.636,-47.015 82.489,-47.869 R133.2@82.489,-48.025 P8.15@89.164,-48.025
  Bottom Layer w0.2: v1(29.21,-32.512) 29.21,-37.135 31.064,-38.989 62.992,-38.989 64.821,-40.818 v1(65.634,-40.818)
GPMC_CSN1-O: P9.2 R2.5 | length 67.3
  Top Layer w0.2: R2.5@29.205,-34.94 29.205,-42.702 28.213,-43.694 26.537,-43.694 25.019,-45.212 25.019,-49.066 23.19,-50.895 23.19,-55.651 24.282,-56.744 63.246,-56.744 64.262,-55.727 P9.2@64.262,-54.578
GPMC_CSN2: J2.79 P8.13 R2.3 R132.2 | length 93.7
  Top Layer w0.2: J2.79@16.275,-17.502 17.502,-17.502 18.13,-18.13 25.242,-18.13 30.08,-22.968 v1(30.08,-32.512) R2.3@30.08,-33.64 ; v1(65.634,-39.472) 73.558,-39.472 79.045,-44.958 81.636,-44.958 82.489,-45.811 R132.2@82.489,-46.025 P8.13@89.164,-46.025
  Bottom Layer w0.2: v1(30.08,-32.512) 30.08,-36.151 32.283,-38.354 63.373,-38.354 64.491,-39.472 v1(65.634,-39.472)
GPMC_CSN2-O: P9.22 R2.6 | length 46
  Top Layer w0.22: v1(30.08,-42.647) R2.6@30.08,-34.94
  Bottom Layer w0.22: v1(30.08,-42.647) 30.08,-44.072 23.28,-50.872 23.28,-55.173 24.533,-56.425 43.6,-56.425 44.262,-55.763 P9.22@44.262,-54.578
GPMC_CSN3: J2.77 R2.2 R30.2 | length 163.1
  Top Layer w0.2: v1(-48.031,-48.412) -49.682,-46.761 -49.682,-33.096 -48.323,-31.737 R30.2@-46.457,-31.737 ; v1(-45.136,-52.07) -33.909,-63.297 -1.651,-63.297 14.173,-47.473 14.173,-46.355 17.389,-43.139 17.389,-36.458 14.173,-33.242 14.173,-33.198 10.687,-29.712 10.687,-18.167 12.623,-16.232 16.275,-16.232 17.552,-16.232 18.181,-16.86 24.963,-16.86 30.88,-22.777 R2.2@30.88,-33.64
  Bottom Layer w0.2: v1(-48.031,-48.412) -48.031,-49.174 v1(-45.136,-52.07)
GPMC_CSN3-O: P9.21 R2.7 | length 46.7
  Top Layer w0.2: v1(30.88,-42.647) R2.7@30.88,-34.94
  Bottom Layer w0.2: v1(30.88,-42.647) 30.88,-43.852 23.69,-51.042 23.69,-55.003 24.702,-56.015 42.875,-56.015 43.282,-55.609 43.282,-53.558 P9.21@44.262,-52.578
GPMC_D0: J2.73 R43.4 | length 31.2
  Top Layer w0.2: J2.73@16.275,-13.692 17.527,-13.692 18.155,-14.32 24.302,-14.32 33.015,-23.033 R43.4@33.015,-33.64
GPMC_D0-O: P9.25 R43.5 | length 42.3
  Top Layer w0.2: v1(27.483,-48.362) 33.015,-42.829 R43.5@33.015,-34.94
  Bottom Layer w0.2: v1(27.483,-48.362) 27.3,-48.362 24.09,-51.572 24.09,-54.837 24.868,-55.615 38.684,-55.615 39.243,-55.056 39.243,-53.597 P9.25@40.262,-52.578
GPMC_D1: J2.71 R43.3 | length 32.6
  Top Layer w0.2: J2.71@16.275,-12.422 17.527,-12.422 18.175,-13.07 23.941,-13.07 33.89,-23.019 R43.3@33.89,-33.64
GPMC_D1-O: P9.26 R43.6 | length 45.9
  Top Layer w0.2: v1(33.89,-42.647) R43.6@33.89,-34.94
  POWER w0.2: v1(33.89,-42.647) 33.89,-43.021 27.711,-49.2 24.994,-49.2 23.089,-51.105 23.089,-55.194 24.714,-56.82 39.446,-56.82 40.262,-56.004 P9.26@40.262,-54.578
GPMC_D2: J2.69 R43.2 | length 34
  Top Layer w0.2: J2.69@16.275,-11.152 17.527,-11.152 18.161,-11.786 23.597,-11.786 34.69,-22.879 R43.2@34.69,-33.64
GPMC_D2-O: P9.27 R43.7 | length 46.7
  Top Layer w0.2: v1(34.69,-42.647) R43.7@34.69,-34.94
  POWER w0.2: v1(34.69,-42.647) 34.69,-42.958 28.048,-49.6 25.159,-49.6 23.489,-51.27 23.489,-55.029 24.88,-56.42 38.678,-56.42 39.268,-55.829 39.268,-53.584 P9.27@38.262,-52.578
GPMC_D3: J2.67 R43.1 | length 35.4
  Top Layer w0.2: J2.67@16.275,-9.882 17.629,-9.882 18.263,-10.516 23.19,-10.516 35.565,-22.89 R43.1@35.565,-33.64
GPMC_D3-O: P9.28 R43.8 | length 42.6
  Top Layer w0.22: v1(35.565,-42.647) R43.8@35.565,-34.94
  POWER w0.22: v1(35.565,-42.647) 35.565,-42.972 28.527,-50.01 25.329,-50.01 23.899,-51.44 23.899,-54.859 25.05,-56.01 37.767,-56.01 38.262,-55.515 P9.28@38.262,-54.578
GPMC_D4: J2.65 R44.4 | length 37
  Top Layer w0.2: J2.65@16.275,-8.612 17.552,-8.612 18.181,-9.24 22.82,-9.24 36.825,-23.245 R44.4@36.825,-33.64
GPMC_D4-O: P9.29 R44.5 | length 43.7
  Top Layer w0.2: v1(36.825,-42.647) R44.5@36.825,-34.94
  POWER w0.2: P9.29@36.262,-52.578 37.287,-53.603 37.287,-55.118 36.805,-55.6 25.22,-55.6 24.309,-54.689 24.309,-51.61 25.499,-50.42 29.26,-50.42 36.825,-42.855 v1(36.825,-42.647)
GPMC_D5: J2.63 R44.2 | length 39.2
  Top Layer w0.2: J2.63@16.275,-7.342 17.578,-7.342 18.206,-7.97 23.261,-7.97 38.5,-23.209 R44.2@38.5,-33.64
GPMC_D5-O: P9.30 R44.7 | length 21.4
  Top Layer w0.22: v1(38.5,-42.647) R44.7@38.5,-34.94
  POWER w0.22: P9.30@36.262,-54.578 35.281,-53.597 35.281,-46.507 38.5,-43.288 v1(38.5,-42.647)
GPMC_D6: J2.61 R46.4 | length 41.7
  Top Layer w0.2: J2.61@16.275,-6.072 17.578,-6.072 18.212,-6.706 23.851,-6.706 40.207,-23.062 40.207,-33.212 R46.4@40.635,-33.64
GPMC_D6-O: P9.31 R46.5 | length 22.7
  Top Layer w0.2: P9.31@34.262,-52.578 34.262,-44.859 35.16,-43.961 39.249,-43.961 40.635,-42.575 R46.5@40.635,-34.94
GPMC_D7: J2.59 R46.2 | length 44
  Top Layer w0.2: J2.59@16.275,-4.802 17.502,-4.802 18.136,-5.436 24.435,-5.436 42.31,-23.311 R46.2@42.31,-33.64
GPMC_D7-O: P9.32 R46.7 | length 25.8
  Top Layer w0.2: P9.32@34.262,-54.578 35.255,-53.585 35.255,-45.441 36.335,-44.361 39.415,-44.361 40.113,-43.663 41.783,-43.663 42.31,-43.136 R46.7@42.31,-34.94
GPMC_D8: J2.66 P8.9 R44.3 R131.2 | length 90.1
  Top Layer w0.2: J2.66@20.825,-8.615 22.966,-8.615 37.7,-23.349 v1(37.7,-32.512) R44.3@37.7,-33.64 ; v1(65.634,-37.059) 75.209,-37.059 79.172,-41.021 81.485,-41.021 R131.2@82.489,-42.025 P8.9@89.164,-42.025
  Bottom Layer w0.2: v1(37.7,-32.512) 37.7,-34.957 39.802,-37.059 v1(65.634,-37.059)
GPMC_D8-O: P9.33 R44.6 | length 19.9
  Top Layer w0.2: v1(37.7,-42.647) R44.6@37.7,-34.94
  POWER w0.2: P9.33@32.262,-52.578 32.262,-48.51 37.7,-43.072 v1(37.7,-42.647)
GPMC_D9: J2.64 P8.7 R44.1 R130.2 | length 89.4
  Top Layer w0.2: J2.64@20.825,-7.345 23.576,-7.345 39.375,-23.144 R44.1@39.375,-33.64 ; v1(65.634,-35.89) 75.743,-35.89 78.892,-39.04 81.763,-39.04 82.489,-39.766 R130.2@82.489,-40.025 P8.7@89.164,-40.025
  Bottom Layer w0.2: v1(39.37,-32.512) 39.37,-33.782 41.478,-35.89 v1(65.634,-35.89)
GPMC_D9-O: P9.34 R44.8 | length 25.1
  Top Layer w0.2: P9.34@32.262,-54.578 33.274,-53.566 33.274,-44.882 34.595,-43.561 38.913,-43.561 39.375,-43.099 R44.8@39.375,-34.94
GPMC_D10: J2.62 P8.5 R46.3 R129.2 | length 88.5
  Top Layer w0.2: J2.62@20.825,-6.075 24.134,-6.075 41.51,-23.451 v1(41.51,-32.512) R46.3@41.51,-33.64 ; v1(65.634,-34.747) 76.606,-34.747 78.892,-37.033 81.497,-37.033 R129.2@82.489,-38.025 P8.5@89.164,-38.025
  Bottom Layer w0.2: v1(41.51,-32.512) 41.51,-33.331 42.926,-34.747 v1(65.634,-34.747)
GPMC_D10-O: P9.35 R46.6 | length 25.3
  Top Layer w0.2: v1(41.51,-42.647) R46.6@41.51,-34.94
  Bottom Layer w0.2: P9.35@30.262,-52.578 30.262,-51.551 37.897,-43.917 39.141,-43.917 39.98,-43.078 39.98,-42.062 40.208,-41.834 41.307,-41.834 41.51,-42.037 v1(41.51,-42.647)
GPMC_D11: J2.60 P8.3 R46.1 R128.2 | length 88.1
  Top Layer w0.2: J2.60@20.825,-4.805 24.795,-4.805 43.185,-23.195 R46.1@43.185,-33.64 ; v1(65.634,-33.604) 80.239,-33.604 82.489,-35.855 R128.2@82.489,-36.025 P8.3@89.164,-36.025
  Bottom Layer w0.2: v1(43.18,-32.512) 43.18,-32.766 44.018,-33.604 v1(65.634,-33.604)
GPMC_D11-O: P9.36 R46.8 | length 31.8
  Top Layer w0.2: v1(43.185,-42.647) R46.8@43.185,-34.94
  Bottom Layer w0.2: P9.36@30.262,-54.578 29.261,-53.577 29.261,-51.689 36.195,-44.755 36.195,-42.113 37.008,-41.3 42.596,-41.3 43.185,-41.89 v1(43.185,-42.647)
GPMC_D12: J2.58 R120.4 | length 42
  Top Layer w0.2: J2.58@20.825,-3.535 24.44,-3.535 44.017,-23.113 44.017,-33.212 R120.4@44.445,-33.64
GPMC_D12-O: P9.37 R120.5 | length 33.2
  Top Layer w0.2: v1(44.445,-42.647) R120.5@44.445,-34.94
  Bottom Layer w0.2: P9.37@28.262,-52.578 28.262,-51.85 33.02,-47.092 33.02,-42.393 34.671,-40.742 43.205,-40.742 44.445,-41.981 v1(44.445,-42.647)
GPMC_D13: J2.56 P2.2 R120.2 | length 175.9
  Top Layer w0.2: P2.2@-89.63,15.875 -89.63,14.09 -84.36,8.82 -64.25,8.82 -43.549,-11.881 -31.528,-11.881 v1(-31.064,-12.344) ; v1(-2.362,-3.505) -0.483,-1.626 17.958,-1.626 18.597,-2.265 J2.56@20.825,-2.265 24.846,-2.265 46.12,-23.539 R120.2@46.12,-33.64
  Bottom Layer w0.2: v1(-31.064,-12.344) -31.064,-12.802 -27.432,-16.434 -14.986,-16.434 -2.362,-3.81 v1(-2.362,-3.505)
GPMC_D13-O: P9.38 R120.7 | length 38.8
  Top Layer w0.22: v1(46.12,-42.647) R120.7@46.12,-34.94
  Bottom Layer w0.22: P9.38@28.262,-54.578 27.28,-53.596 27.28,-51.943 32.512,-46.711 32.512,-41.859 33.376,-40.996 33.837,-40.996 34.501,-40.332 43.375,-40.332 44.039,-40.996 45.491,-40.996 46.12,-41.624 v1(46.12,-42.647)
GPMC_D14: J2.54 P3.2 R10.4 | length 202.1
  Top Layer w0.2: J2.54@20.825,-0.995 25.277,-0.995 47.827,-23.545 47.827,-33.212 R10.4@48.255,-33.64
  Top Layer w0.22: P3.2@-89.63,34.29 -89.63,27.769 -91.694,25.705 -91.694,14.097 -86.007,8.41 -64.42,8.41 -43.719,-12.291 -32.693,-12.291 v1(-32.36,-12.624) ; v1(-2.108,-2.083) -0.382,-0.357 11.049,-0.357 11.052,-0.36 18.085,-0.36 18.72,-0.995 J2.54@20.825,-0.995
  Bottom Layer w0.22: v1(-32.36,-12.624) -28.042,-16.942 -14.776,-16.942 -1.346,-3.512 -1.346,-2.845 v1(-2.108,-2.083)
GPMC_D14-O: P9.39 R10.5 | length 39.8
  Top Layer w0.22: v1(48.255,-42.647) R10.5@48.255,-34.94
  Bottom Layer w0.22: P9.39@26.262,-52.578 26.262,-52.224 32.004,-46.482 32.004,-41.402 32.969,-40.437 33.802,-40.437 34.327,-39.912 43.549,-39.912 44.074,-40.437 46.914,-40.437 48.255,-41.778 v1(48.255,-42.647)
GPMC_D15: J2.52 P6.10 R10.2 | length 139.7
  Top Layer w0.2: v1(-3.937,24.511) -10.541,17.907 -10.541,15.875 -7.874,13.208 -2.794,13.208 9.491,0.923 14.788,0.923 14.791,0.92 17.759,0.92 17.762,0.923 18.381,0.923 19.029,0.275 J2.52@20.825,0.275 25.76,0.275 49.93,-23.895 R10.2@49.93,-33.64 ; v1(-1.651,26.797) 11.176,39.624 11.176,56.515 9.557,58.134 P6.10@8.508,58.134
  Bottom Layer w0.2: v1(-3.937,24.511) v1(-1.651,26.797)
GPMC_D15-O: P9.40 R10.7 | length 45.3
  Top Layer w0.22: v1(49.93,-42.647) R10.7@49.93,-34.94
  Bottom Layer w0.22: P9.40@26.262,-54.578 25.222,-53.538 25.222,-52.07 31.584,-45.708 31.584,-41.228 32.795,-40.017 33.628,-40.017 34.153,-39.492 43.723,-39.492 44.248,-40.017 48.627,-40.017 49.93,-41.319 v1(49.93,-42.647)
GPMC_OEN_REN: J2.87 R9.3 | length 19.4
  Top Layer w0.2: J2.87@16.275,-22.582 17.425,-22.582 18.059,-23.216 24.003,-23.216 26.27,-25.483 R9.3@26.27,-33.64
GPMC_OEN_REN-O: P9.3 R9.6 | length 61.6
  Top Layer w0.2: v1(26.27,-42.647) R9.6@26.27,-34.94 ; v1(26.645,-46.355) 26.645,-49.137 24.39,-51.392 24.39,-55.154 24.779,-55.544 60.985,-55.544 61.265,-55.264 61.265,-53.575 P9.3@62.262,-52.578
  Bottom Layer w0.2: v1(26.27,-42.647) 26.264,-42.653 26.264,-45.974 v1(26.645,-46.355)
GPMC_WAIT0: J2.30 R60.2 | length 65.6
  Top Layer w0.2: J2.30@20.825,14.245 22.356,14.245 61.36,-24.759 R60.2@61.36,-33.64
GPMC_WAIT0-O: P9.23 R60.7 | length 30.9
  Top Layer w0.2: v1(61.36,-42.647) R60.7@61.36,-34.94
  Bottom Layer w0.2: P9.23@42.262,-52.578 42.425,-52.578 51.366,-43.637 60.369,-43.637 v1(61.36,-42.647)
GPMC_WEN: J2.89 R9.4 | length 17.8
  Top Layer w0.2: J2.89@16.275,-23.852 17.425,-23.852 18.054,-24.48 24.124,-24.48 25.395,-25.751 R9.4@25.395,-33.64
GPMC_WEN-O: P9.5 R9.5 | length 64.6
  Top Layer w0.22: v1(25.395,-42.647) R9.5@25.395,-34.94
  Bottom Layer w0.22: v1(25.395,-42.647) 25.395,-48.163 22.86,-50.698 22.86,-55.347 24.359,-56.845 60.223,-56.845 61.265,-55.804 61.265,-53.581 P9.5@60.262,-52.578
GPMC_WPN: J2.34 R60.4 | length 62.7
  Top Layer w0.2: J2.34@20.825,11.705 22.991,11.705 59.685,-24.989 R60.4@59.685,-33.64
GPMC_WPN-O: P9.24 R60.5 | length 33.9
  Top Layer w0.2: v1(59.685,-42.647) R60.5@59.685,-34.94
  Bottom Layer w0.2: P9.24@42.262,-54.578 41.275,-53.591 41.275,-52.045 42.386,-50.933 43.504,-50.933 52.908,-41.529 58.567,-41.529 v1(59.685,-42.647)
I2C0_SCL: J1.52 R156.2 U1.6 | length 102.9
  Top Layer w0.2: v1(-83.566,27.305) -81.991,27.305 -81.369,27.928 R156.2@-81.369,29.21 ; v1(-56.896,9.525) -50.724,3.353 -39.167,3.353 -38.456,2.642 -38.456,1.321 -38.049,0.914 -36.885,0.914 -35.789,0.914 -35.052,1.651 -35.052,6.477 -33.274,8.255 -28.651,8.255 -27.635,7.239 -27.635,1.499 -27.04,0.903 -20.207,0.903 -19.579,0.275 J1.52@-18.175,0.275
  Bottom Layer w0.2: v1(-83.566,27.305) -84.176,26.695 -84.176,12.471 -83.033,11.328 -58.699,11.328 v1(-56.896,9.525)
I2C0_SDA: J1.50 R157.2 U1.5 | length 102.9
  Top Layer w0.2: v1(-82.779,32.41) -81.966,32.41 -81.369,31.813 R157.2@-81.369,30.912 ; v1(-55.118,9.271) -49.6,3.753 -38.454,3.753 -36.885,2.184 -36.678,2.184 -35.687,3.175 -35.687,6.604 -33.636,8.655 -28.486,8.655 -27.235,7.405 -27.235,2.673 -26.735,2.173 -21.096,2.173 -20.468,1.545 J1.50@-18.175,1.545
  Bottom Layer w0.2: v1(-82.779,32.41) -82.779,26.721 -83.718,25.781 -83.718,12.776 -82.753,11.811 -57.658,11.811 v1(-55.118,9.271)
I2C1_SCL: J1.56 J15.8 R98.1 R142.1 U11.1 | length 168
  Top Layer w0.2: v1(-81.394,33.668) R142.1@-81.394,34.773 ; v1(-63.348,31.267) -64.509,32.429 U11.1@-65.703,32.429 -65.703,32.849 -62.357,36.195 R98.1@-62.357,36.944 ; v1@-59.665,23.038 -59.919,23.038 -60.319,22.638 -60.319,10.546 -41.905,-7.868 -28.95,-7.868 -25.603,-4.521 -25.603,-2.667 -24.562,-1.626 -20.676,-1.626 -20.036,-2.265 J1.56@-18.175,-2.265 v1(-15.727,-2.265) ; v1(-11.43,-1.753) -11.43,-1.778 -9.906,-3.302 -9.906,-4.191 -7.95,-6.147 -1.854,-6.147 3.607,-11.608 3.607,-16.662 8.187,-21.243 8.187,-30.686 10.025,-32.524 J15.8@10.025,-44.925
  Bottom Layer w0.2: v1(-81.394,33.668) -77.864,33.668 -76.962,32.766 -64.846,32.766 v1(-63.348,31.267) -59.969,27.889 -59.969,25.146 -59.461,24.638 -59.461,23.495 v1(-59.817,23.139) ; v1(-15.727,-2.265) -11.942,-2.265 v1(-11.43,-1.753)
I2C1_SDA: J1.58 J15.7 R99.1 R143.1 U11.2 | length 168.4
  Top Layer w0.2: R143.1@-81.432,36.538 v1(-81.432,37.389) ; U11.2@-66.203,32.429 -66.203,33.975 v1(-65.964,34.214) -63.754,36.424 R99.1@-63.754,36.944 ; v1(-59.284,22.403) -59.919,21.768 -59.919,10.711 -41.74,-7.468 -29.134,-7.468 -26.416,-4.75 v1(-26.416,-3.556) ; J1.58@-18.175,-3.535 v1(-15.693,-3.535) ; v1(-9.881,-2.24) -9.246,-2.875 -9.246,-4.191 -7.874,-5.563 -1.626,-5.563 4.14,-11.328 4.14,-16.332 8.607,-20.799 8.607,-30.512 10.525,-32.43 J15.7@10.525,-44.925
  Bottom Layer w0.2: v1(-81.432,37.389) -80.035,37.389 -76.86,34.214 v1(-65.964,34.214) -65.075,34.214 -62.484,31.623 -62.484,31.115 -59.284,27.915 -59.284,25.327 -58.928,24.972 -58.928,22.758 v1(-59.284,22.403) ; v1(-26.416,-3.556) -26.395,-3.535 v1(-15.693,-3.535) -15.519,-3.708 -11.349,-3.708 v1(-9.881,-2.24)
ISINK1: J1.20
ISINK2: J1.22
JTAG_EMU0: J1.96 P1.13 R19.2 | length 84.3
  Top Layer w0.2: P1.13@-72.813,-60.736 -73.829,-59.72 -73.829,-55.261 -73.447,-55.261 -72.898,-54.712 -72.898,-52.908 -72.009,-52.019 -64.796,-52.019 -61.951,-54.864 -52.848,-54.864 -43.565,-45.581 -25.769,-45.581 -23.768,-43.58 -23.768,-34.03 -22.581,-32.842 v1(-21.438,-32.842) ; v1(-20.193,-27.94) -19.918,-27.665 J1.96@-18.175,-27.665
  Bottom Layer w0.2: v1(-21.438,-32.842) -21.438,-28.931 -20.447,-27.94 v1(-20.193,-27.94)
JTAG_EMU1: J1.98 P1.14 R18.2 | length 83.9
  Top Layer w0.2: P1.14@-72.813,-62.736 -71.806,-61.729 -71.806,-55.436 -71.984,-55.258 -71.616,-55.258 -68.777,-52.419 -64.962,-52.419 -62.116,-55.264 -52.682,-55.264 -43.399,-45.981 -25.603,-45.981 -23.241,-43.619 -23.241,-34.493 -22.301,-33.553 v1(-20.828,-33.553) ; v1(-20.193,-28.905) -18.205,-28.905 J1.98@-18.175,-28.935
  Bottom Layer w0.2: v1(-20.828,-33.553) -20.447,-33.553 -19.279,-32.385 -19.279,-29.515 -19.888,-28.905 v1(-20.193,-28.905)
JTAG_TCK: J1.92 P1.9 P1.11 | length 85.5
  Top Layer w0.2: P1.11@-70.813,-60.736 P1.9@-68.813,-60.736 -68.813,-54.614 -67.056,-52.857 -65.089,-52.857 -62.282,-55.664 -52.517,-55.664 -43.233,-46.381 -25.437,-46.381 -22.733,-43.676 -22.733,-34.925 -22.2,-34.392 v1(-21.336,-34.392) ; J1.92@-18.175,-25.125 -16.379,-25.125 v1(-15.773,-25.73)
  Bottom Layer w0.2: v1(-21.336,-34.392) -20.574,-34.392 -18.72,-32.537 -18.72,-28.677 v1(-15.773,-25.73)
JTAG_TDI: J1.90 P1.3 | length 75.8
  Top Layer w0.2: P1.3@-62.813,-60.736 -58.973,-56.896 -52.051,-56.896 -42.736,-47.581 -24.94,-47.581 -21.196,-43.837 -21.196,-36.182 -19.787,-34.773 -17.628,-34.773 -16.942,-34.087 v1(-16.942,-33.604) ; J1.90@-18.175,-23.855 -15.236,-23.855 -14.656,-24.435 v1(-14.656,-27.864)
  Bottom Layer w0.2: v1(-16.942,-33.604) -16.916,-33.579 -16.916,-30.124 v1(-14.656,-27.864)
JTAG_TDO: J1.88 P1.7 | length 81.9
  Top Layer w0.2: P1.7@-66.813,-60.736 -62.541,-56.464 -52.185,-56.464 -42.902,-47.181 -25.106,-47.181 -21.596,-43.671 -21.596,-35.897 -19.304,-33.604 v1(-17.907,-33.604) ; J1.88@-18.175,-22.585 -14.702,-22.585 -13.818,-23.47 v1(-13.818,-27.076)
  Bottom Layer w0.2: v1(-17.907,-33.604) -17.551,-33.249 -17.551,-29.642 -14.986,-27.076 v1(-13.818,-27.076)
JTAG_TMS: J1.94 P1.1 | length 70
  Top Layer w0.2: P1.1@-60.813,-60.736 -57.43,-57.353 -51.943,-57.353 -42.57,-47.981 -24.774,-47.981 -20.796,-44.003 -20.796,-36.544 -19.812,-35.56 -16.967,-35.56 -16.104,-34.696 -16.104,-26.797 -16.506,-26.395 J1.94@-18.175,-26.395
JTAG_TRSTN: J1.86 P1.2 R29.1 | length 100.7
  Top Layer w0.2: R29.1@-66.294,-55.385 -65.519,-55.385 -63.773,-57.131 -62.707,-56.064 -52.351,-56.064 -43.067,-46.781 -25.272,-46.781 -21.996,-43.505 v1(-21.996,-35.255) ; R29.1@-66.294,-55.207 -66.815,-55.207 -67.818,-56.21 -67.818,-63.551 -67.259,-64.11 -61.519,-64.11 -60.813,-63.404 P1.2@-60.813,-62.736 ; J1.86@-18.175,-21.315 -14.093,-21.315 -13.005,-22.403 v1(-13.005,-26.213)
  Bottom Layer w0.2: v1(-21.996,-35.255) -20.549,-35.255 -18.11,-32.817 -18.11,-29.083 -15.24,-26.213 v1(-13.005,-26.213)
LCD_AC_BIAS_EN: J2.97 J15.45 | length 42.5
  Top Layer w0.2: J15.45@-8.475,-44.925 -8.475,-43.654 -6.477,-41.656 -6.477,-27.356 v1(-6.579,-27.254) ; v1(13.768,-28.932) J2.97@16.275,-28.932
  Bottom Layer w0.2: v1(-6.579,-27.254) -4.445,-29.388 13.312,-29.388 v1(13.768,-28.932)
LCD_D0: J2.98 J15.19 | length 31.4
  Top Layer w0.2: J15.19@4.525,-44.925 4.525,-30.476 v1(5.004,-29.997) ; v1(18.673,-28.935) J2.98@20.825,-28.935
  Bottom Layer w0.2: v1(5.004,-29.997) 17.611,-29.997 v1(18.673,-28.935)